# EAGLE board gapburn_shield (EAGLE 7.7.0)
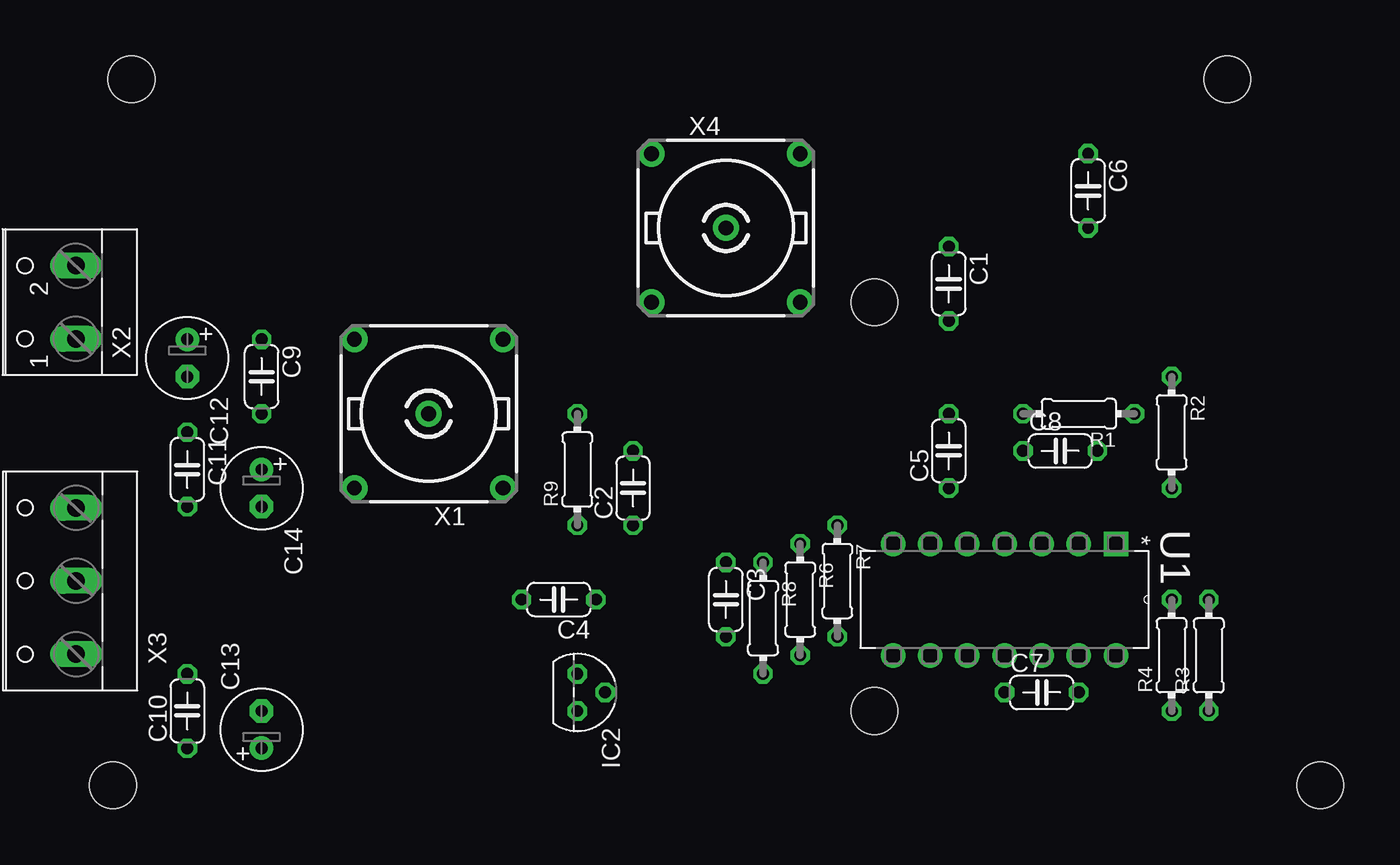
[diagram p0: board, top side]
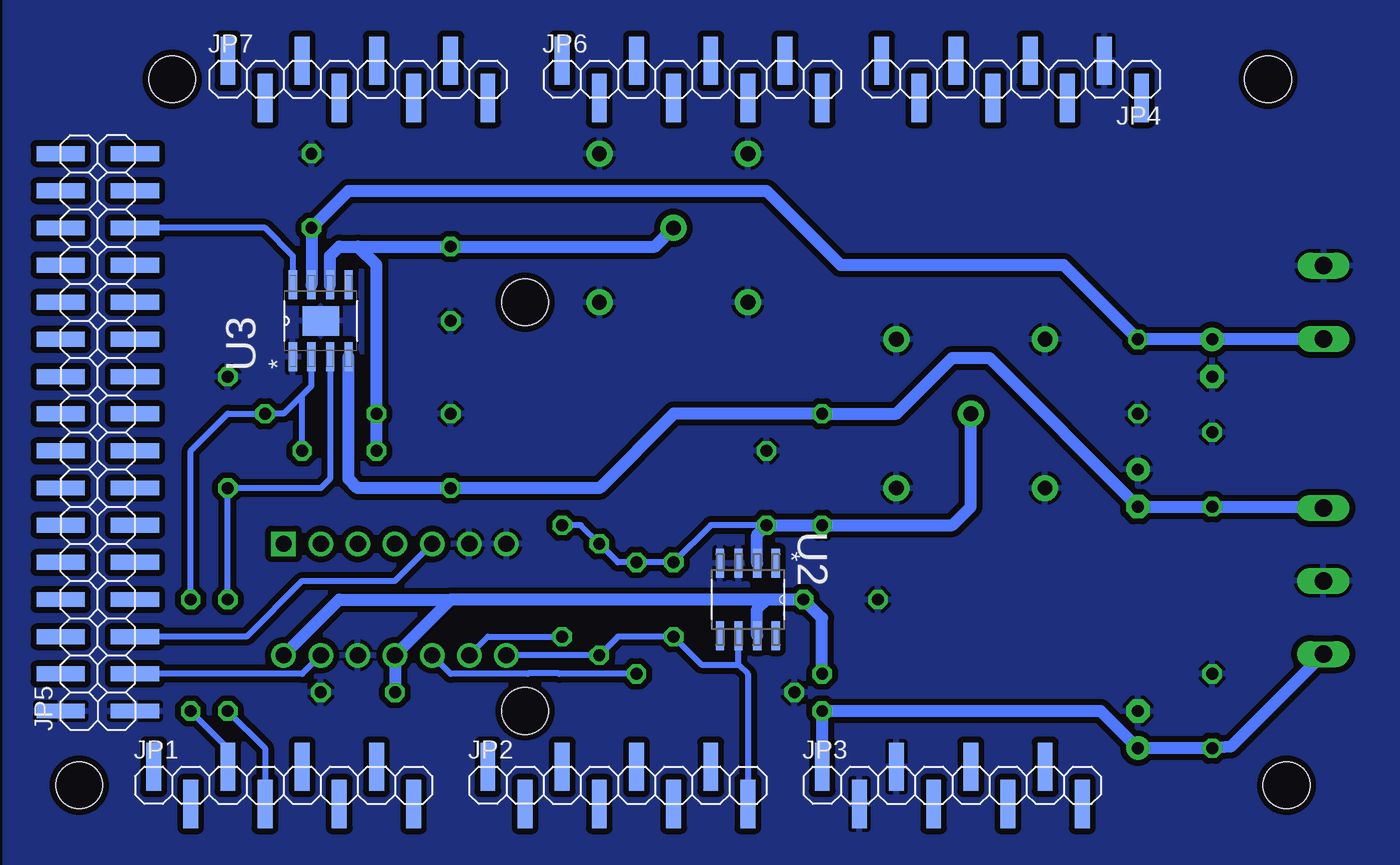
[diagram p1: board, bottom side, seen from below]

No outline drawn. Coordinates in mm, seen from the top.
Copper layers (1*16): Top 0.035mm / dielectric 1.5mm / Bottom 0.035mm
Design rules "default *": minimum track width 6mil, minimum drill 0.35mm, track to track 6mil, track to pad 6mil, pad to pad 6mil, via to via 6mil, smd to smd 6mil, copper to edge 0mil, drill to drill 6mil, minimum pad ring 10mil, minimum via ring 8mil, stop-mask expansion 4mil, vias tented up to drill 0mil, thermal gap 10mil
Net classes: 0 default: width 0.406 mm, clearance 0.203 mm
Holes 3.2 mm at 15.24,50.8 13.97,2.54 66.04,7.62 96.52,2.54 90.17,50.8 66.04,35.56

## Footprints (pad centres in the part's own frame; a part is rotated, then mirrored left to right if it is on the bottom)
C050-024X044 = drill 0.813 octagon: 1 -2.54,0; 2 2.54,0
E2,5-6 = drill 0.813 pad 1.6: + -1.27,0 | drill 0.813 pad 1.6 octagon: - 1.27,0
TO92 = drill 0.813 octagon: 1 -1.27,0; 2 0,1.905; 3 1.27,0
1X08SMD = smd 1.016 x 3.302: 1 -1.27,1.27; 2 1.27,-1.27; 3 3.81,1.27; 4 6.35,-1.27; 5 8.89,1.27; 6 11.43,-1.27; 7 13.97,1.27; 8 16.51,-1.27
2X16SMD = smd 1.016 x 3.302: 1 -1.27,-3.81; 2 -1.27,1.27; 3 1.27,-3.81; 4 1.27,1.27; 5 3.81,-3.81; 6 3.81,1.27; 7 6.35,-3.81; 8 6.35,1.27; 9 8.89,-3.81; 10 8.89,1.27; 11 11.43,-3.81; 12 11.43,1.27; 13 13.97,-3.81; 14 13.97,1.27; 15 16.51,-3.81; 16 16.51,1.27; 17 19.05,-3.81; 18 19.05,1.27; 19 21.59,-3.81; 20 21.59,1.27; 21 24.13,-3.81; 22 24.13,1.27; 23 26.67,-3.81; 24 26.67,1.27; 25 29.21,-3.81; 26 29.21,1.27; 27 31.75,-3.81; 28 31.75,1.27; 29 34.29,-3.81; 30 34.29,1.27; 31 36.83,-3.81; 32 36.83,1.27
0204/7 = drill 0.813 octagon: 1 -3.81,0; 2 3.81,0
DIP254P762X508-14 = drill 1.118 square: 1 -7.62,15.24 | drill 1.118: 2 -7.62,12.7; 3 -7.62,10.16; 4 -7.62,7.62; 5 -7.62,5.08; 6 -7.62,2.54; 7 -7.62,0; 8 0,0; 9 0,2.54; 10 0,5.08; 11 0,7.62; 12 0,10.16; 13 0,12.7; 14 0,15.24
SOIC127P600X175-8N = smd 1.981 x 0.559: 1 -2.464,1.905; 2 -2.464,0.635; 3 -2.464,-0.635; 4 -2.464,-1.905; 5 2.464,-1.905; 6 2.464,-0.635; 7 2.464,0.635; 8 2.464,1.905
SOIC127P600X170-9N = smd 1.981 x 0.559: 1 -2.464,1.905; 2 -2.464,0.635; 3 -2.464,-0.635; 4 -2.464,-1.905; 5 2.464,-1.905; 6 2.464,-0.635; 7 2.464,0.635; 8 2.464,1.905 | smd 2.007 x 2.489: 9 0,0
A1944 = drill 1.016 pad 1.778: 1 0,0; 2 5.08,5.08; 3 -5.08,5.08; 4 -5.08,-5.08; 5 5.08,-5.08
W237-102 = drill 1.194 long: 1 -2.5,-1.27; 2 2.5,-1.27
W237-103 = drill 1.194 long: 1 -5,-1.29; 2 0,-1.29; 3 5,-1.29

## Placement (x,y rotation side)
C1  10pF  [C050-024X044]  71.12,36.83 270 top
C2  10pF  [C050-024X044]  49.53,22.86 90 top
C3  10pF  [C050-024X044]  55.88,15.24 270 top
C4  100nF  [C050-024X044]  44.45,15.24 180 top
C5  100nF  [C050-024X044]  71.12,25.4 90 top
C6  100nF  [C050-024X044]  80.64,43.18 270 top
C7  100nF  [C050-024X044]  77.47,8.89 0 top
C8  10pF  [C050-024X044]  78.74,25.4 0 top
C9  100nF  [C050-024X044]  24.13,30.48 270 top
C10  100nF  [C050-024X044]  19.05,7.62 90 top
C11  100nF  [C050-024X044]  19.05,24.13 270 top
C12  10µF  [E2,5-6]  19.05,31.75 270 top
C13  10µF  [E2,5-6]  24.13,6.35 90 top
C14  10µF  [E2,5-6]  24.13,22.86 270 top
IC2  78L05Z  [TO92]  45.72,8.89 270 top
JP1  [1X08SMD]  90.17,2.54 0 bottom
JP2  [1X08SMD]  67.31,2.54 0 bottom
JP3  [1X08SMD]  44.45,2.54 0 bottom
JP4  [1X08SMD]  25.15,50.8 180 bottom
JP5  [2X16SMD]  96.52,8.89 90 bottom
JP6  [1X08SMD]  62.23,50.8 0 bottom
JP7  [1X08SMD]  85.09,50.8 0 bottom
R1  330 kOhm  [0204/7]  80.01,27.94 180 top
R2  330 kOhm  [0204/7]  86.36,26.67 270 top
R3  10 kOhm  [0204/7]  88.9,11.43 90 top
R4  10 kOhm  [0204/7]  86.36,11.43 90 top
R6  1,8 kOhm  [0204/7]  60.96,15.24 270 top
R7  270 Ohm  [0204/7]  63.5,16.51 270 top
R8  470 Ohm  [0204/7]  58.42,13.97 270 top
R9  1,2 kOhm  [0204/7]  45.72,24.13 90 top
U1  CD4066BE  [DIP254P762X508-14]  67.31,11.43 270 top
U2  OPA380AID  [SOIC127P600X175-8N]  50.8,15.24 270 bottom
U3  OPA454AIDDA  [SOIC127P600X170-9N]  80.01,34.29 90 bottom
X1  A1944-50  [A1944]  35.56,27.94 180 top
X2  [W237-102]  10.16,35.56 90 top
X3  [W237-103]  10.16,16.51 90 top
X4  A1944-50  [A1944]  55.88,40.64 0 top

## Library data of the parts
C1-C14 = rcl; SPICEPREFIX: C
IC2 = linear
JP1-JP7 = pinhead-2
R1-R4 R6-R9 = eagle-ltspice; SPICEMODEL: NONE; SPICEPREFIX: R
U1 = Texas Instruments_By_element14_Batch_1; MPN: CD4066BE; OC_FARNELL: 1106112; OC_NEWARK: 60K5124; PACKAGE: PDIP-14; SUPPLIER: Texas Instruments
U2 = Texas Instruments_By_element14_Batch_1; MPN: OPA380AID; OC_FARNELL: -; OC_NEWARK: 01J0608; PACKAGE: SOIC-8; SUPPLIER: Texas Instruments
U3 = Texas Instruments_By_element14_Batch_1; MPN: OPA454AIDDA; OC_FARNELL: 1703220; OC_NEWARK: 73M3405; PACKAGE: SOIC-8; SUPPLIER: Texas Instruments
X1 X4 = con-coax; OC_FARNELL: unknown; OC_NEWARK: unknown
X2 = con-wago-500; MPN: 237-102; OC_FARNELL: unknown; OC_NEWARK: 70K9898
X3 = con-wago-500; MPN: 237-103; OC_FARNELL: unknown; OC_NEWARK: 18M7116

## Nets
80V: C6.2 C9.1 C12.+ U3.7 X2.1
+5V: C4.1 C7.1 IC2.1 U1.11 U1.14 U2.7
+12V: C10.1 C13.+ IC2.3 JP3.1 X3.1
-12V: C5.1 C11.2 C14.- R9.2 U3.4 X3.3
GND: C1.2 C2.2 C4.2 C5.2 C6.1 C7.2 C9.2 C10.2 C11.1 C12.- C13.- C14.+ IC2.2 JP3.2 JP3.3 JP4.2 JP5.1 JP5.2 R2.1 U1.6 U1.7 U1.12 U2.3 U2.4 U3.1 U3.9 X1.2 X1.3 X1.4 X1.5 X2.2 X3.2 X4.2 X4.3 X4.4 X4.5
N$1: R2.2 R4.2 U3.3
N$2: C8.2 R1.1 R3.2 U3.2
N$3: C1.1 C8.1 R1.2 U3.6 X4.1
N$5: R8.2 U1.10
N$6: C2.1 C3.1 R6.1 R7.1 R8.1 R9.1 U2.2 X1.1
N$7: JP5.5 U1.5
N$8: C3.2 JP2.8 R6.2 U1.8 U2.6
N$9: R7.2 U1.9
N$10: JP5.27 U3.8
N$11: JP1.4 R4.1
N$12: JP5.3 U1.13
N$15: JP1.3 R3.1

## Tracks (layer width: path | path; a pad name or v marks a point on that pad's centre or on a via)
80V
  Bottom 0.61: 48.39,42.04 44.45,38.1
  Bottom 0.813: X2.1 11.47,33.02 C12.+ C9.1 29.21,38.1 44.45,38.1 49.53,43.18 78.11,43.18 C6.2 U3.7
+5V
  Bottom 0.813: U2.7 50.16,14.61 49.53,15.24 | IC2.1 45.72,13.97 C4.1 49.53,15.24 | C7.1 U1.11 71.12,15.24 | 49.53,15.24 71.12,15.24 | U1.14 78.74,15.24 71.12,15.24
+12V
  Bottom 0.406: IC2.3 JP3.1
  Bottom 0.813: X3.1 17.78,5.18 C10.1 C13.+ 26.67,7.62 IC2.3 45.72,4.09
-12V
  Bottom 0.813: X3.3 11.53,21.59 C11.2 C14.- 34.29,31.75 36.83,31.75 40.64,27.94 R9.2 55.88,27.94 60.96,22.86 C5.1 77.47,22.86 78.11,23.5 U3.4
GND
  pour Bottom (isolate 0.406): 3.54,64 3.54,-9 101.54,-9 101.54,64
N$1
  Bottom 0.406: U3.3 79.38,23.5 80.01,22.86 R2.2 R4.2
N$2
  Bottom 0.406: C8.2 81.28,29.21 | 81.28,29.21 80.64,29.84 U3.2 | 81.28,29.21 82.55,27.94 R1.1 86.36,27.94 88.9,25.4 R3.2
N$3
  Bottom 0.813: U3.6 79.38,38.73 78.74,39.37 77.47,39.37 | C8.1 R1.2 76.2,38.1 77.47,39.37 | 77.47,39.37 C1.1 57.15,39.37 X4.1
N$5
  Bottom 0.406: U1.10 71.12,10.16 65.86,10.16 65.83,10.19 63.71,10.19 63.68,10.16 R8.2
N$6
  Bottom 0.406: C2.1 53.34,20.32 C3.1 R8.1 59.69,17.78 R6.1 62.23,20.32 R7.1
  Bottom 0.813: U2.2 50.16,19.68 C2.1 R9.1 36.83,20.32 35.56,21.59 X1.1
N$7
  Bottom 0.406: U1.5 74.93,16.51 81.28,16.51 85.09,12.7 92.63,12.7 JP5.5
N$8
  Bottom 0.406: 51.44,10.79 U2.6 | 51.44,10.79 50.8,10.16 JP2.8 | 51.44,10.79 53.98,10.79 C3.2 59.69,12.7 R6.2 U1.8
N$9
  Bottom 0.406: U1.9 68.58,12.7 R7.2
N$10
  Bottom 0.406: U3.8 81.92,38.73 83.82,40.64 92.63,40.64 JP5.27
N$11
  Bottom 0.406: R4.1 83.82,5.08 JP1.4
N$12
  Bottom 0.406: U1.13 81.28,10.16 91.44,10.16 92.63,10.16 JP5.3
N$15
  Bottom 0.406: R3.1 86.36,5.08 86.36,3.89 JP1.3